# Altium PCB 按键（修改后）.PcbDoc
Units mm, origin at the board's own origin, x right, y up, seen from the top; angles counter-clockwise.
Board outline 85 x 22.02 mm, 2 copper layers (Top Layer, Bottom Layer); 9 components, 12 nets, 38 pads, 29 vias.
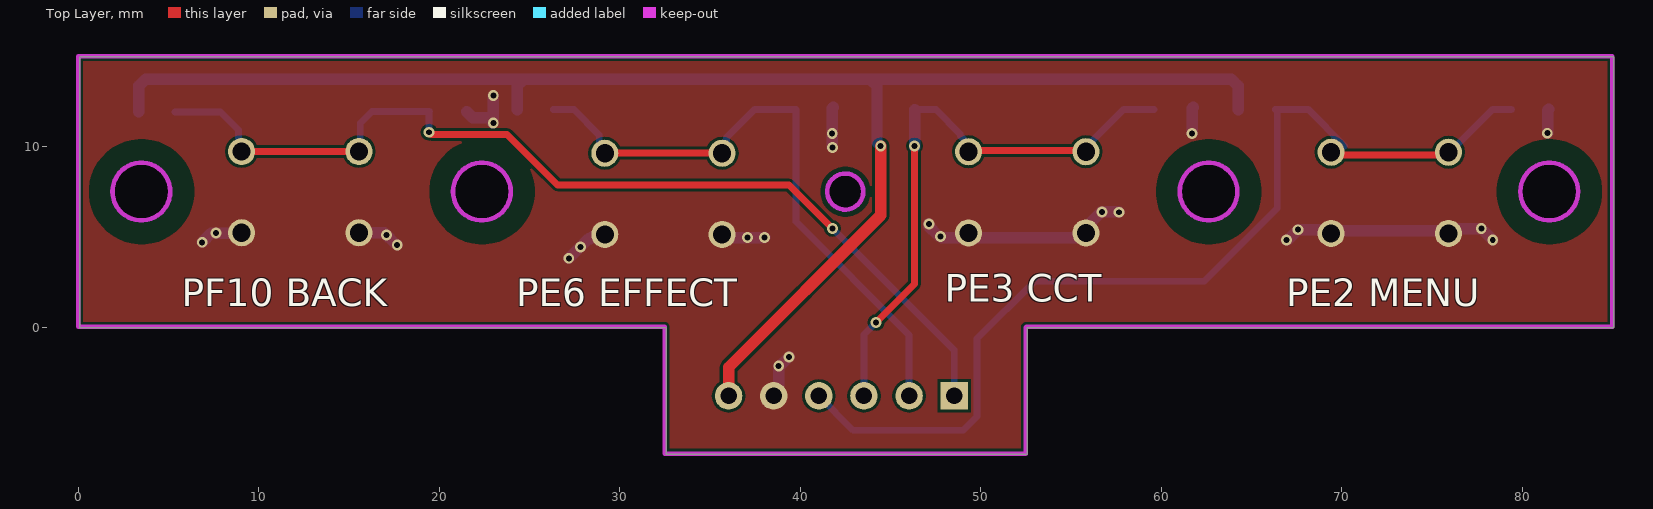
[diagram p0: Top Layer view]
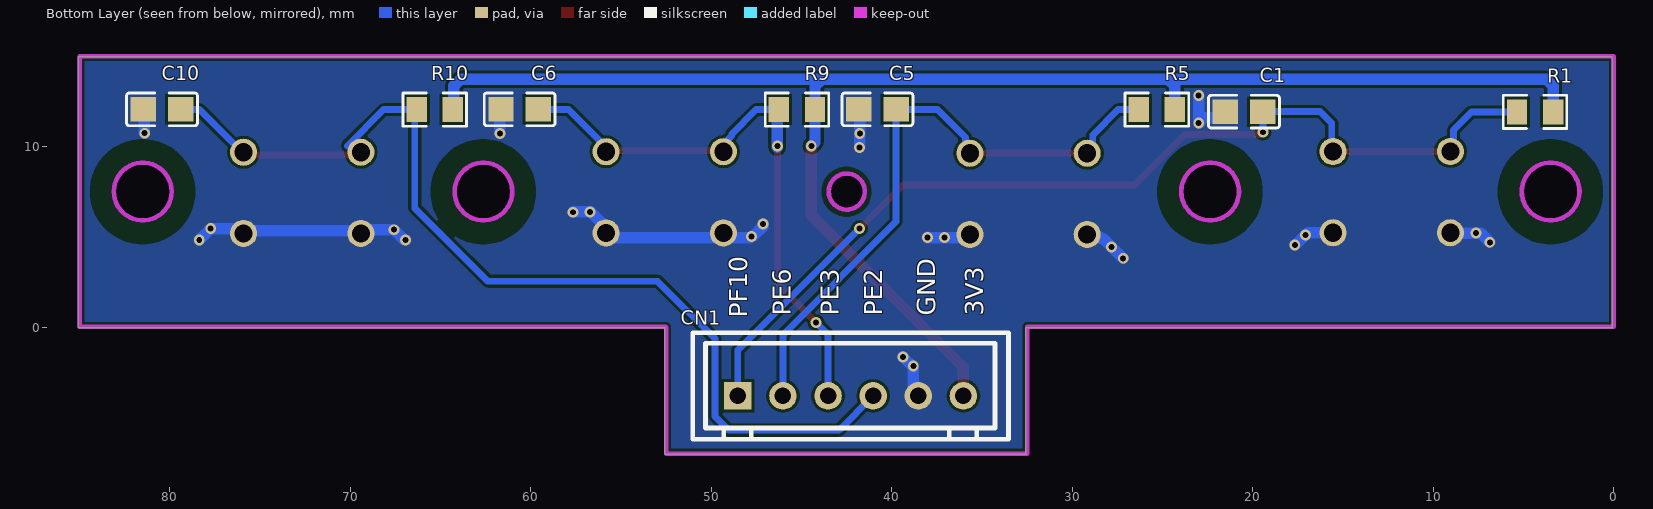
[diagram p1: Bottom Layer view, seen from below]

## Layer stack, top to bottom
Top Solder: solder mask 0.0102, Solder Resist, Dk 3.5
Top Layer: signal copper 0.0356
Dielectric 1: dielectric 0.32, FR-4, Dk 4.8
Bottom Layer: signal copper 0.0356
Bottom Solder: solder mask 0.0102, Solder Resist, Dk 3.5

## Board outline
0.064,-0.025 0.064,14.975 85.064,14.975 85.064,-0.025 52.588,-0.025 52.56,-0.053 52.56,-7.04 32.56,-7.04 32.56,-0.025
cut-out: 79.9,7.5 ccw(c81.5,7.5) 81.5,5.9 ccw(c81.5,7.5) 83.1,7.5 ccw(c81.5,7.5) 81.5,9.1 ccw(c81.5,7.5)
cut-out: 61.025,7.5 ccw(c62.625,7.5) 62.625,5.9 ccw(c62.625,7.5) 64.225,7.5 ccw(c62.625,7.5) 62.625,9.1 ccw(c62.625,7.5)
cut-out: 41.495,7.5 ccw(c42.495,7.5) 42.495,6.5 ccw(c42.495,7.5) 43.495,7.5 ccw(c42.495,7.5) 42.495,8.5 ccw(c42.495,7.5)
cut-out: 20.765,7.5 ccw(c22.365,7.5) 22.365,5.9 ccw(c22.365,7.5) 23.965,7.5 ccw(c22.365,7.5) 22.365,9.1 ccw(c22.365,7.5)
cut-out: 3.5,5.9 ccw(c3.5,7.5) 5.1,7.5 ccw(c3.5,7.5) 3.5,9.1 ccw(c3.5,7.5) 1.9,7.5 ccw(c3.5,7.5)

## Design rules (kind name [scope] priority, off if disabled: settings)
Clearance [All] p1: gap=0.152 ignorepadtopadclearanceinfootprint=FALSE
ComponentClearance [All] p1: gap=0.152 collisioncheckmode=3 verticalgap=0.152 showdistances=FALSE
HoleSize [All] p1: absolutevalues=TRUE maxlimit=5.08 minlimit=0.025 maxpercent=80.000 minpercent=20.000
HoleToHoleClearance [All] p1: gap=0 allowstackedmicrovias=TRUE
MinimumSolderMaskSliver [All] p1: minsoldermaskwidth=0
PolygonConnect [All] p1: connectstyle=Direct reliefconductorwidth=0.254 reliefentries=4 polygonreliefangle="90 Angle" airgapwidth=0.254
RoutingVias [All] p1: holewidth=0.305 width=0.508 viastyle="Through Hole" minholewidth=0.305 minwidth=0.508 maxholewidth=0.711 maxwidth=1.27
SilkToSilkClearance [All] p1: silktosilkclearance=0
SilkToSolderMaskClearance [IsPad] p1: minsilkscreentomaskgap=0 clearancetoexposedcopper=TRUE
SolderMaskExpansion [All] p1: expansion=0.102 istentingtop=FALSE
Width [All] p1: maxlimit=2.54 minlimit=0.203 preferedwidth=0.254
24 further rules are at their usual default settings.

## Classes and differential pairs
component class Sheet1: C1 C5 C6 C10 CN1 R5 R9 R10

## Components (designator, comment, footprint, x,y, rotation, side; value= is the part's Value field where it differs from the comment)
C1 "100nF C0805" C0805 20.479,11.936 r180 bottom value=10uF
C5 "100nF C0805" C0805 40.785,12.063 r180 bottom value=10uF
C6 "100nF C0805" C0805 60.611,12.063 r180 bottom value=10uF
C10 "100nF C0805" C0805 80.423,12.063 r180 bottom value=10uF
CN1 "XH2.56-1*6P直插" H2.54-1*6P-直插CONN-TH_6P-P2.50_HC-XH-6A-G 42.271,-3.81 r180 bottom
R1 "10K R0805" R0805 4.35,11.923 r0 bottom value=10kΩ
R5 "10K R0805" R0805 25.305,12.05 r0 bottom value=10kΩ
R9 "10K R0805" R0805 45.244,12.05 r0 bottom value=10kΩ
R10 "10K R0805" R0805 65.31,12.05 r0 bottom value=10kΩ

## Footprints (in the part's own frame and the unit in brackets; to place one, negate y for a bottom-side part, rotate by r counter-clockwise, add the part's x,y. Pads: shape width x height; smd on the part's side, far side on the other; paste and mask are expansions set on the pad)
C0805 [mm]
  rect 1.41x1.35 smd paste-100 mask+0.051: 1(-1.03,0) 2(1.03,0)
  silkscreen extent -1.96,-0.9 1.96,0.9
H2.54-1*6P-直插CONN-TH_6P-P2.50_HC-XH-6A-G [mil]
  rect 60x60 hole 36 paste+0 mask+1.97: 1(-246.07,0)
  round 60 hole 36 paste+0 mask+1.97: 2(-147.63,0) 3(-49.22,0) 4(49.22,0) 5(147.63,0) 6(246.07,0)
  silkscreen extent -344,-94 344,138
R0805 [mm]
  rect 1.133x1.377 smd paste-100 mask+0.051: 1(-1,0) 2(1,0)
  silkscreen extent -1.76,-0.92 1.76,0.92

## Part data
C1 C5 C6 C10: library part C0805, JLCPCB Part Class="Basic Part", LCSC Part Name="10uF ±10% 25V", Manufacturer=SAMSUNG(三?, Manufacturer Part=CL21A106KAYNNNE, Temperature Coefficient=X5R, Tolerance=±10%, Voltage Rated=25V, Add into BOM=yes, Convert to PCB=yes, Datasheet=https://atta.szlcsc.com/upload/public/pdf/source/20160103/1457707679302.pdf, Device=CL21A106KAYNNNE_C15850, Name=10uF, Supplier=LCSC, Supplier Footprint=0805, Supplier Part=C15850, Symbol=CL21A106KAYNNNE
CN1: Current Rating (Max)=3A, LCSC Part Name="XH 2.54mm 1x6P 弯?", Manufacturer=HCTL(华?, Manufacturer Part=HC-XH-6AW-G, Operating Temperature Range=-25℃~+85?, Add into BOM=yes, Convert to PCB=yes, Datasheet=https://atta.szlcsc.com/upload/public/pdf/source/20230105/4FFD2EFD3DA44AA828171A44400F3EDE.pdf, Device=HC-XH-6AW-G, Gender=公?, Mounting Style=弯?, Name=HC-XH-6AW-G, Number of PINs Per Row=6, Number of Rows=1, Pins Structure=1x6P, Pitch=2.54mm, Reference Series=XH, Row Spacing=2.54mm, Supplier=LCSC, Supplier Footprint=弯插,P=, Supplier Part=C5341212, Symbol=HC-XH-6AW-G
R1 R5 R9 R10: library part R0805, JLCPCB Part Class="Basic Part", LCSC Part Name="10KΩ ?", Manufacturer=UNI-ROYAL(厚?, Manufacturer Part=0805W8F1002T5E, Operating Temperature Range=-55℃~+155?, Overload Voltage (Max)=150V, Power(Watts)=1/8W, Temperature Coefficient=±100ppm/?, Tolerance=±1%, Add into BOM=yes, Convert to PCB=yes, Datasheet=https://atta.szlcsc.com/upload/public/pdf/source/20170920/C17414_1505887067106979773.pdf, Device=0805W8F1002T5E_C17414, Name=10kΩ, Supplier=LCSC, Supplier Footprint=0805, Supplier Part=C17414, Symbol=0805W8F1002T5E

## Free pads (board coordinates)
  round 1.5 hole 1: 2(9.045,5.227) 2(9.045,9.727) 2(15.545,5.227) 2(15.545,9.727) 2(29.163,5.132) 2(29.163,9.632) 2(35.663,5.132) 2(35.663,9.632) 2(49.32,5.216) 2(49.32,9.716) 2(55.82,5.216) 2(55.82,9.716) 2(69.405,5.188) 2(69.405,9.688) 2(75.905,5.188) 2(75.905,9.688)

## Via types
v1: diameter 0.6, hole 0.33, Top Layer to Bottom Layer, tented both sides, 29 vias

## Nets (pads, with @x,y where several pads share a name; then routed paths per layer and width w, separated by ;. In a path a pad name is that pad's centre, name@x,y a point inside that pad or via, vN(x,y) a via of type N, cw(c..) or ccw(c..) an arc to the next point about the centre after c; other vN are vias at no path point)
3V3: CN1.6 R1.1 R5.1 R9.1 R10.1 | length 87.1
  Top Layer w0.635: CN1.6 36.021,-2.235 44.45,6.194 v1(44.45,10.033)
  Bottom Layer w0.635: R1.1 3.35,13.364 3.722,13.736 24.677,13.736 ; R5.1 24.305,13.364 24.677,13.736 ; v1(44.45,10.033) 44.244,10.239 R9.1 44.244,13.364 43.872,13.736 ; R10.1@64.25,12.05 64.25,13.364 63.878,13.736 43.872,13.736 ; 24.677,13.736 43.872,13.736
GND: C1.1 C5.1 C6.1 C10.1 CN1.5 pad.2@9.045,5.227 pad.2@15.545,5.227 pad.2@29.163,5.132 pad.2@35.663,5.132 pad.2@49.32,5.216 pad.2@55.82,5.216 pad.2@69.405,5.188 pad.2@75.905,5.188 | length 44.4
  Bottom Layer w0.635: v1(6.858,4.699) 7.366,5.207 9.025,5.207 pad.2@9.045,5.227 ; pad.2@15.466,5.227 16.948,5.227 17.624,4.551 v1(17.661,4.551) ; pad.2@15.545,5.227 pad.2@15.914,5.227 ; C1.1 21.842,11.602 22.632,11.602 ; v1@22.924,11.311 v1(22.987,11.311) v1(22.987,12.827) ; v1(27.17,3.81) 27.178,3.81 28.263,4.895 28.358,4.895 28.43,4.966 28.997,4.966 pad.2@29.163,5.132 ; pad.2@35.663,5.132 35.835,4.96 v1(37.077,4.96) 38.005,4.96 v1(38.017,4.972) ; CN1.5 38.798,-3.533 v1(38.798,-2.159) 38.862,-2.159 39.37,-1.651 v1(39.374,-1.651) ; v1(41.771,9.954) 41.771,12.132 C5.1@41.829,12.19 ; v1(47.117,5.715) 47.117,5.588 47.625,5.08 47.686,5.019 v1(47.77,5.019) 47.83,4.96 55.252,4.96 56.673,6.381 v1(56.706,6.381) 57.634,6.381 v1(57.652,6.363) ; v1@61.71,10.734 61.71,12.132 C6.1@61.768,12.19 ; v1(66.929,4.826) 67.001,4.826 v1(67.573,5.397) 69.196,5.397 69.405,5.188 69.551,5.334 75.759,5.334 pad.2@75.905,5.188 ; pad.2@75.905,5.461 v1(77.724,5.461) v1(78.359,4.826) ; v1@81.395,10.745 81.395,12.005 C10.1
  other v1: 27.813,4.445 17.071,5.096 7.62,5.207 41.761,10.734 61.7,10.734 81.379,10.745
PB4: 
PB5: 
PB6: 
PB7: 
PC4: 
PC5: 
PE2: C10.2 CN1.4 pad.2@69.405,9.688 pad.2@75.905,9.688 R10.2 | length 54.8
  Top Layer w0.381: pad.2@69.405,9.688 69.568,9.525 75.742,9.525 pad.2@75.905,9.688
  Bottom Layer w0.381: CN1.4@41.021,-3.81 42.926,-5.715 49.022,-5.715 49.784,-4.953 49.784,-0.635 52.959,2.54 62.357,2.54 66.421,6.604 R10.2@66.421,11.811 ; R10.2 68.141,12.05 70.15,10.04 ; pad.2@75.905,9.688 75.982,9.688 78.339,12.045 79.375,12.045 C10.2
PE3: C6.2 CN1.3 pad.2@49.32,9.716 pad.2@55.82,9.716 R9.2 | length 32.9
  Top Layer w0.381: v1(44.196,0.254) 46.328,2.386 v1(46.328,10.035) ; pad.2@49.32,9.716 49.382,9.779 55.757,9.779 pad.2@55.82,9.716
  Bottom Layer w0.381: CN1.3 43.521,-0.421 v1(44.196,0.254) ; R9.2 46.343,12.05 47.513,12.05 48.853,10.71 48.853,10.621 49.32,10.154 pad.2@49.32,9.716 ; pad.2@55.82,9.716 55.82,9.973 57.91,12.063 C6.2
  Bottom Layer w0.635: v1@46.343,9.954 R9.2@46.343,12.05
PE6: C5.2 CN1.2 pad.2@29.163,9.632 pad.2@35.663,9.632 R5.2 | length 34.4
  Top Layer w0.381: pad.2@29.163,9.632 29.183,9.652 35.643,9.652 pad.2@35.663,9.632
  Bottom Layer w0.381: R5.2 27.447,12.05 28.853,10.644 28.853,9.942 pad.2@29.163,9.632 ; pad.2@35.557,10.157 35.858,10.157 35.896,10.195 35.896,10.496 37.463,12.063 C5.2 39.755,5.838 46.021,-0.428 CN1.2
PF10: C1.2 CN1.1 pad.2@9.045,9.727 pad.2@15.545,9.727 R1.2 | length 55.1
  Top Layer w0.381: pad.2@9.045,9.727 pad.2@15.545,9.727 ; v1(19.431,10.795) 19.558,10.668 23.749,10.668 26.543,7.874 39.37,7.874 v1(41.783,5.461)
  Bottom Layer w0.381: R1.2 7.878,11.923 8.878,10.922 8.878,9.893 pad.2@9.045,9.727 ; pad.2@15.616,9.799 15.616,11.298 16.254,11.936 C1.2 19.431,11.918 v1(19.431,10.795) ; v1(41.783,5.461) 48.521,-1.277 CN1.1

## Polygon pours and split planes (outlines as drawn)
GND on Top Layer "GND_L01_P013" (solid, remove dead copper, pour order 13): -8.001,-19.05 -6.731,-17.78 94.742,-17.78 94.742,34.798 94.615,34.925 83.439,23.749 -1.778,23.749
GND on Top Layer "GND_L01_P009" (solid, remove dead copper, pour order 9): 38.608,-27.432
no net on Top Layer "NONET_L01_P001" (solid, remove dead copper, pour order 1): 0.508,-0.381
GND on Bottom Layer "GND_L02_P012" (solid, remove dead copper, pour order 12): -4.826,-12.319 91.694,-12.319 91.694,26.035 -2.667,26.035 -5.461,23.241

## Keep-outs
Keep-Out Layer:
  circle w0.254: c42.484,7.509 r1
  circle w0.254: c3.489,7.509 r1.6
  circle w0.254: c22.354,7.509 r1.6
  circle w0.254: c62.614,7.509 r1.6
  circle w0.254: c81.489,7.509 r1.6
  lines w0.254: -0.011,0.009 -0.011,15.009 84.989,15.009 84.989,0.009 63.739,0.009 52.512,0.009 52.484,-0.02 52.484,-7.007 42.484,-7.007 32.484,-7.007 32.484,0.009 21.239,0.009 -0.011,0.009

## Other copper
Top Layer:
  pour cut-out: 78.59,7.5 ccw(c81.5,7.5) 81.5,4.59 ccw(c81.5,7.5) 84.41,7.5 ccw(c81.5,7.5) 81.5,10.41 ccw(c81.5,7.5)
  pour cut-out: 59.716,7.5 ccw(c62.625,7.5) 62.625,4.59 ccw(c62.625,7.5) 65.535,7.5 ccw(c62.625,7.5) 62.625,10.41 ccw(c62.625,7.5)
  pour cut-out: 41.116,7.5 ccw(c42.495,7.5) 42.495,6.121 ccw(c42.495,7.5) 43.875,7.5 ccw(c42.495,7.5) 42.495,8.879 ccw(c42.495,7.5)
  pour cut-out: 19.456,7.5 ccw(c22.365,7.5) 22.365,4.59 ccw(c22.365,7.5) 25.275,7.5 ccw(c22.365,7.5) 22.365,10.41 ccw(c22.365,7.5)
  pour cut-out: 3.5,4.59 cw(c3.5,7.5) 0.59,7.5 cw(c3.5,7.5) 3.5,10.41 cw(c3.5,7.5) 6.41,7.5 cw(c3.5,7.5)
Bottom Layer:
  pour cut-out: 78.59,7.5 ccw(c81.5,7.5) 81.5,4.59 ccw(c81.5,7.5) 84.41,7.5 ccw(c81.5,7.5) 81.5,10.41 ccw(c81.5,7.5)
  pour cut-out: 59.716,7.5 ccw(c62.625,7.5) 62.625,4.59 ccw(c62.625,7.5) 65.535,7.5 ccw(c62.625,7.5) 62.625,10.41 ccw(c62.625,7.5)
  pour cut-out: 41.116,7.5 ccw(c42.495,7.5) 42.495,6.121 ccw(c42.495,7.5) 43.875,7.5 ccw(c42.495,7.5) 42.495,8.879 ccw(c42.495,7.5)
  pour cut-out: 19.456,7.5 ccw(c22.365,7.5) 22.365,4.59 ccw(c22.365,7.5) 25.275,7.5 ccw(c22.365,7.5) 22.365,10.41 ccw(c22.365,7.5)
  pour cut-out: 3.5,4.59 cw(c3.5,7.5) 0.59,7.5 cw(c3.5,7.5) 3.5,10.41 cw(c3.5,7.5) 6.41,7.5 cw(c3.5,7.5)

## Silkscreen, mask and mechanical layers (free items; w line width, h text height)
Top Overlay:
  text "PE3 CCT" at 48.006,1.397 h1.52
  text "PF10 BACK" at 5.715,1.143 h1.52
  text "PE6 EFFECT" at 24.257,1.143 h1.52
  text "PE2 MENU" at 66.929,1.143 h1.52
Bottom Overlay:
  text "3V3" at 34.925,0.635 h1.02 r270
  text "GND" at 37.592,0.635 h1.02 r270
  text "PE2" at 40.513,0.635 h1.02 r270
  text "PE3" at 42.926,0.635 h1.02 r270
  text "PE6" at 45.593,0.635 h1.02 r270
  text "PF10" at 48.006,0.508 h1.02 r270
Mechanical 1:
  circle w0.254: c81.5,7.5 r1.6
  circle w0.254: c62.625,7.5 r1.6
  circle w0.254: c22.365,7.5 r1.6
  circle w0.254: c3.5,7.5 r1.6
  circle w0.254: c42.495,7.5 r1
  lines w0.254: 0,0 21.25,0 32.495,0 32.495,-7.015 42.495,-7.015 52.495,-7.015 52.495,-0.028 52.524,0 63.75,0 85,0 85,15 0,15 0,0